# Altium PCB PCB_prob_2024-08-24.pcbdoc
Units mil, origin at the board's own origin, x right, y up, seen from the top; angles counter-clockwise.
Board outline 13105 x 5110 mil, 2 copper layers (Top Layer, Bottom Layer); 57 components, 34 nets, 213 pads, 17 vias.
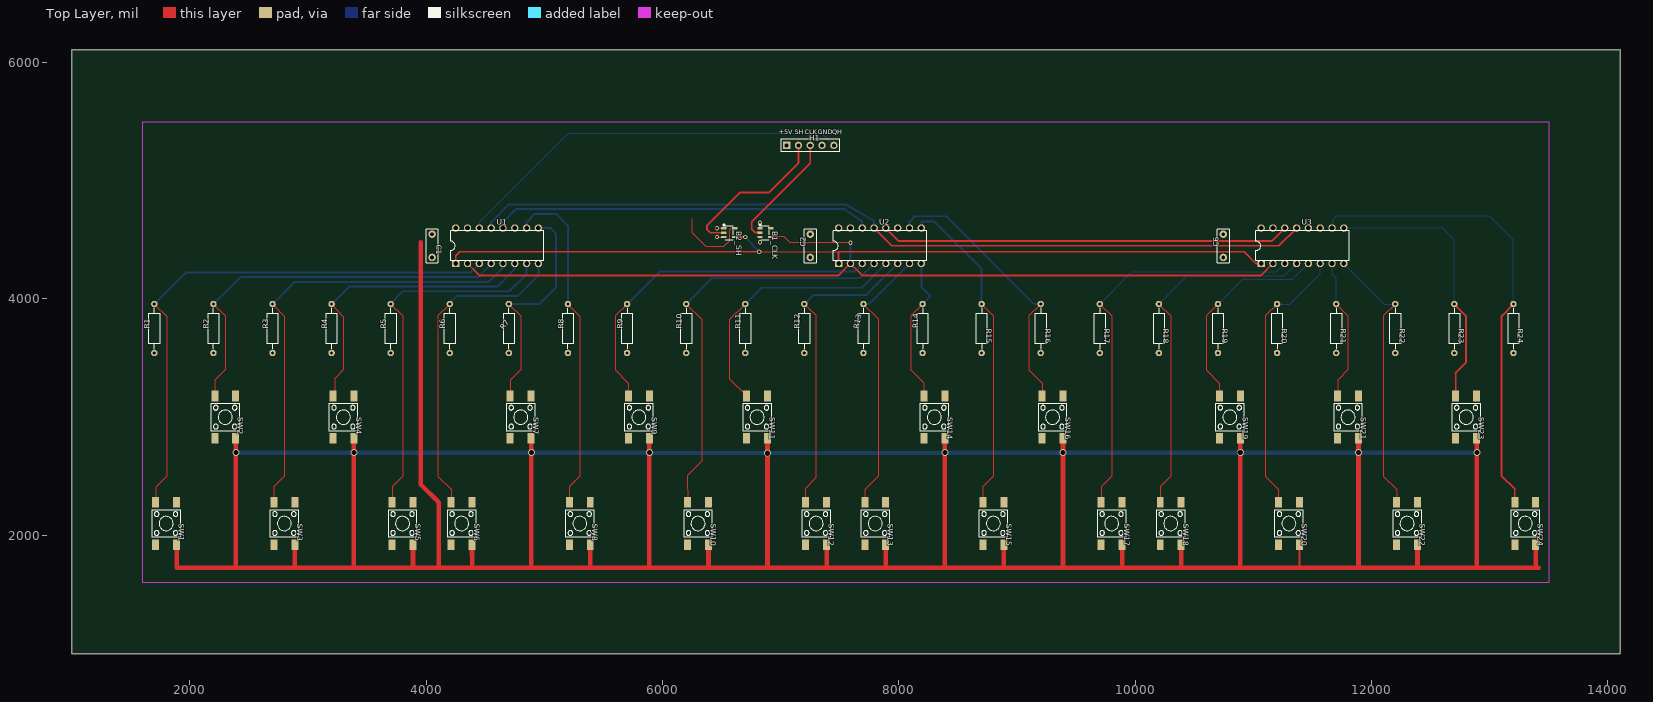
[diagram p0: Top Layer view]
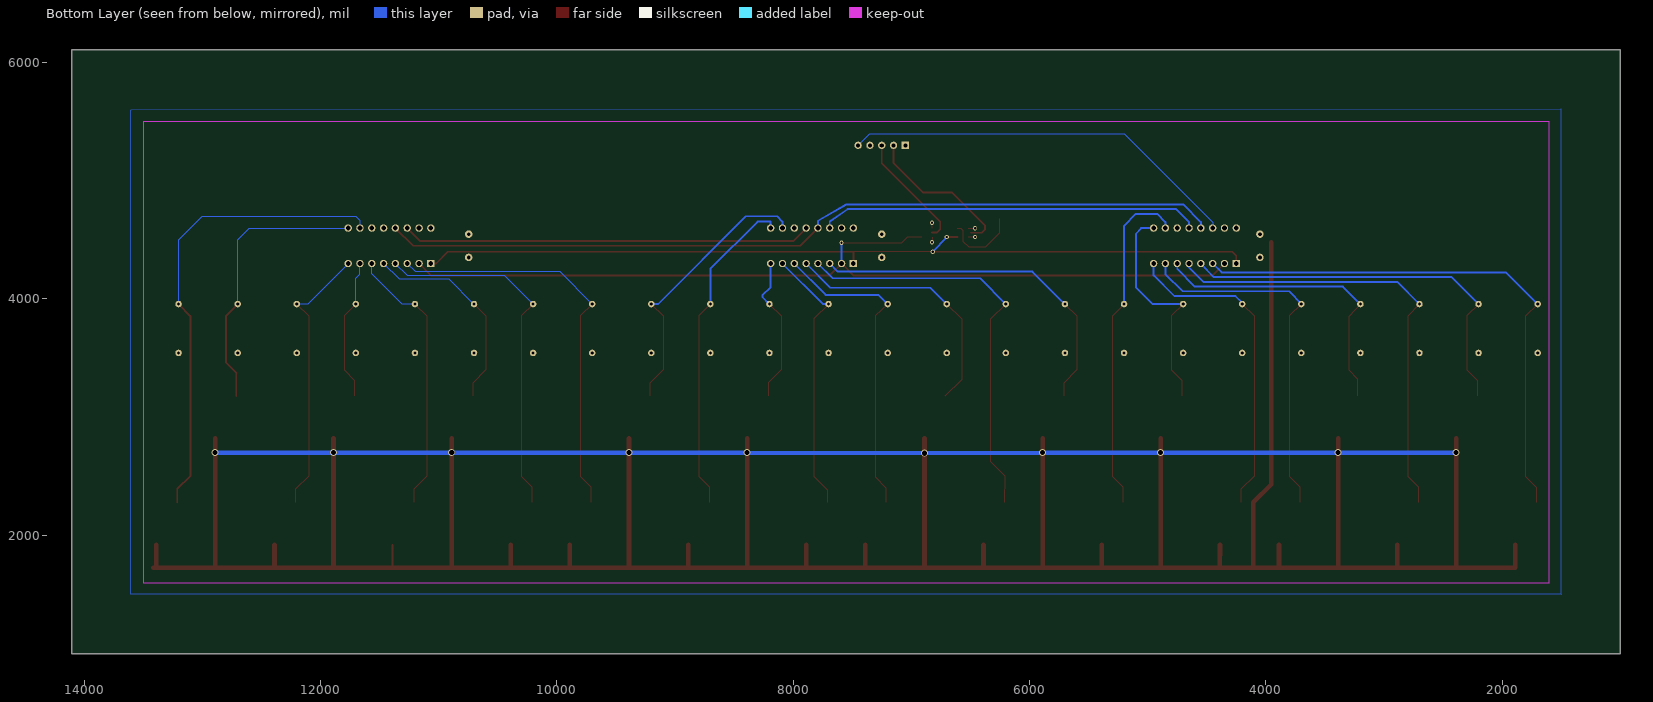
[diagram p1: Bottom Layer view, seen from below]

## Layer stack, top to bottom
Top Layer: signal copper (thickness not stored)
Dielectric: dielectric 12.6, FR-4, Dk 4.8
Bottom Layer: signal copper (thickness not stored)

## Board outline
14105,1000 1000,1000 1000,6110 14105,6110

## Components (designator, comment, footprint, x,y, rotation, side; value= is the part's Value field where it differs from the comment)
B1_CLK "SN74LVC1G125DBVR" SOT-23-5_L3.0-W1.7-P0.95-LS2.8-BL 6870,4561.02 r270 top
B2_SH "SN74LVC1G125DBVR" SOT-23-5_L3.0-W1.7-P0.95-LS2.8-BL 6565,4561.02 r270 top
C1 "100nF" CAP-TH_L7.2-W2.5-P5.00-D0.5 4050,4450 r270 top
C2 "100nF" CAP-TH_L7.2-W2.5-P5.00-D0.5 7250,4450 r90 top
C6 "100nF" CAP-TH_L7.2-W2.5-P5.00-D0.5 10745,4450 r90 top
H1 "HDR-F-2.54_1x5" HDR-F-2.54_1X5 7250,5300 r0 top
R1 "110kΩ" RES-TH_BD2.3-L6.5-P10.50-D0.5 1700,3750 r90 top
R2 "110kΩ" RES-TH_BD2.3-L6.5-P10.50-D0.5 2200,3750 r90 top
R3 "110kΩ" RES-TH_BD2.3-L6.5-P10.50-D0.5 2700,3750 r90 top
R4 "110kΩ" RES-TH_BD2.3-L6.5-P10.50-D0.5 3200,3750 r90 top
R5 "110kΩ" RES-TH_BD2.3-L6.5-P10.50-D0.5 3700,3750 r90 top
R6 "110kΩ" RES-TH_BD2.3-L6.5-P10.50-D0.5 4200,3750 r90 top
R7 "110kΩ" RES-TH_BD2.3-L6.5-P10.50-D0.5 4700,3750 r90 top
R8 "110kΩ" RES-TH_BD2.3-L6.5-P10.50-D0.5 5199.99,3750 r90 top
R9 "110kΩ" RES-TH_BD2.3-L6.5-P10.50-D0.5 5700,3750 r270 top
R10 "110kΩ" RES-TH_BD2.3-L6.5-P10.50-D0.5 6200,3750 r270 top
R11 "110kΩ" RES-TH_BD2.3-L6.5-P10.50-D0.5 6700,3750 r270 top
R12 "110kΩ" RES-TH_BD2.3-L6.5-P10.50-D0.5 7200,3750 r270 top
R13 "110kΩ" RES-TH_BD2.3-L6.5-P10.50-D0.5 7700,3750 r270 top
R14 "110kΩ" RES-TH_BD2.3-L6.5-P10.50-D0.5 8200,3750 r270 top
R15 "110kΩ" RES-TH_BD2.3-L6.5-P10.50-D0.5 8700,3750 r270 top
R16 "110kΩ" RES-TH_BD2.3-L6.5-P10.50-D0.5 9200,3750 r270 top
R17 "110kΩ" RES-TH_BD2.3-L6.5-P10.50-D0.5 9700,3750 r270 top
R18 "110kΩ" RES-TH_BD2.3-L6.5-P10.50-D0.5 10200,3750 r270 top
R19 "110kΩ" RES-TH_BD2.3-L6.5-P10.50-D0.5 10700,3750 r270 top
R20 "110kΩ" RES-TH_BD2.3-L6.5-P10.50-D0.5 11200,3750 r270 top
R21 "110kΩ" RES-TH_BD2.3-L6.5-P10.50-D0.5 11699.98,3750 r270 top
R22 "110kΩ" RES-TH_BD2.3-L6.5-P10.50-D0.5 12199.98,3750 r270 top
R23 "110kΩ" RES-TH_BD2.3-L6.5-P10.50-D0.5 12699.98,3750 r270 top
R24 "110kΩ" RES-TH_BD2.3-L6.5-P10.50-D0.5 13199.98,3750 r270 top
SW1 "SW" SW-SMD_4P-L6.0-W6.0-P4.50-LS9.0-2 1800,2100 r270 top
SW2 "SW" SW-SMD_4P-L6.0-W6.0-P4.50-LS9.0-2 2300,3000 r270 top
SW3 "SW" SW-SMD_4P-L6.0-W6.0-P4.50-LS9.0-2 2800,2100 r270 top
SW4 "SW" SW-SMD_4P-L6.0-W6.0-P4.50-LS9.0-2 3300,3000 r270 top
SW5 "SW" SW-SMD_4P-L6.0-W6.0-P4.50-LS9.0-2 3800,2100 r270 top
SW6 "SW" SW-SMD_4P-L6.0-W6.0-P4.50-LS9.0-2 4300,2100 r270 top
SW7 "SW" SW-SMD_4P-L6.0-W6.0-P4.50-LS9.0-2 4800,3000 r270 top
SW8 "SW" SW-SMD_4P-L6.0-W6.0-P4.50-LS9.0-2 5300,2100 r270 top
SW9 "SW" SW-SMD_4P-L6.0-W6.0-P4.50-LS9.0-2 5800,3000 r270 top
SW10 "SW" SW-SMD_4P-L6.0-W6.0-P4.50-LS9.0-2 6300,2100 r270 top
SW11 "SW" SW-SMD_4P-L6.0-W6.0-P4.50-LS9.0-2 6800,3000 r270 top
SW12 "SW" SW-SMD_4P-L6.0-W6.0-P4.50-LS9.0-2 7300,2100 r270 top
SW13 "SW" SW-SMD_4P-L6.0-W6.0-P4.50-LS9.0-2 7800,2100 r270 top
SW14 "SW" SW-SMD_4P-L6.0-W6.0-P4.50-LS9.0-2 8300,3000 r270 top
SW15 "SW" SW-SMD_4P-L6.0-W6.0-P4.50-LS9.0-2 8800,2100 r270 top
SW16 "SW" SW-SMD_4P-L6.0-W6.0-P4.50-LS9.0-2 9300,3000 r270 top
SW17 "SW" SW-SMD_4P-L6.0-W6.0-P4.50-LS9.0-2 9800,2100 r270 top
SW18 "SW" SW-SMD_4P-L6.0-W6.0-P4.50-LS9.0-2 10300,2100 r270 top
SW19 "SW" SW-SMD_4P-L6.0-W6.0-P4.50-LS9.0-2 10800,3000 r270 top
SW20 "SW" SW-SMD_4P-L6.0-W6.0-P4.50-LS9.0-2 11300,2100 r270 top
SW21 "SW" SW-SMD_4P-L6.0-W6.0-P4.50-LS9.0-2 11799.98,3000 r270 top
SW22 "SW" SW-SMD_4P-L6.0-W6.0-P4.50-LS9.0-2 12299.98,2100 r270 top
SW23 "SW" SW-SMD_4P-L6.0-W6.0-P4.50-LS9.0-2 12799.98,3000 r270 top
SW24 "SW" SW-SMD_4P-L6.0-W6.0-P4.50-LS9.0-2 13299.98,2100 r270 top
U1 "SN74HC165N" DIP-16_L19.8-W6.5-P2.54-LS7.6-BL 4600,4450 r0 top
U2 "SN74HC165N" DIP-16_L19.8-W6.5-P2.54-LS7.6-BL 7840,4450 r0 top
U3 "SN74HC165N" DIP-16_L19.8-W6.5-P2.54-LS7.6-BL 11415,4450 r0 top

## Footprints (in the part's own frame and the unit in brackets; to place one, negate y for a bottom-side part, rotate by r counter-clockwise, add the part's x,y. Pads: shape width x height; smd on the part's side, far side on the other; paste and mask are expansions set on the pad)
CAP-TH_L7.2-W2.5-P5.00-D0.5 [mm]
  round 1.6 hole 0.8 paste+0 mask+0.05: 1(-2.5,0) 2(2.5,0)
  silkscreen extent -3.6,-1.25 3.6,1.25
DIP-16_L19.8-W6.5-P2.54-LS7.6-BL [mm]
  rect 1.6x1.6 hole 1 paste+0 mask+0.051: 1(-8.89,-3.81)
  round 1.6 hole 1 paste+0 mask+0.051: 2(-6.35,-3.81) 3(-3.81,-3.81) 4(-1.27,-3.81) 5(1.27,-3.81) 6(3.81,-3.81) 7(6.35,-3.81) 8(8.89,-3.81) 9(8.89,3.81) 10(6.35,3.81) 11(3.81,3.81) 12(1.27,3.81) 13(-1.27,3.81) 14(-3.81,3.81) 15(-6.35,3.81) 16(-8.89,3.81)
  silkscreen extent -10,-3.2 10,3.2
HDR-F-2.54_1X5 [mil]
  rect 62x62 hole 35 paste+0 mask+2: 1(-200,0)
  round 62 hole 35 paste+0 mask+2: 2(-100,0) 3(0,0) 4(100,0) 5(200,0)
  silkscreen extent -250,-50 250,50
RES-TH_BD2.3-L6.5-P10.50-D0.5 [mm]
  round 1.4 hole 0.7 paste+0 mask+0.051: 1(-5.25,0) 2(5.25,0)
  silkscreen extent -4.32,-1.15 4.32,1.15
SOT-23-5_L3.0-W1.7-P0.95-LS2.8-BL [mm]
  rect 0.49x1.157 smd paste+0 mask+0.051: 1(-0.95,-1.154) 2(0,-1.154) 3(0.95,-1.154)
  rect 0.49x1.175 smd paste+0 mask+0.051: 4(0.95,1.154) 5(-0.95,1.154)
  silkscreen extent -1.8,-1.29 1.53,0.85
SW-SMD_4P-L6.0-W6.0-P4.50-LS9.0-2 [mm]
  rect 2.3x1.5 smd paste+0 mask+0.051: 1(-4.55,2.25) 2(4.55,2.25) 3(-4.55,-2.25) 4(4.55,-2.25)
  silkscreen extent -3,-3 3,3

## Via types
v1: diameter 59.06, hole 43.31, Top Layer to Bottom Layer, tented both sides, 10 vias
v2: diameter 35.43, hole 19.69, Top Layer to Bottom Layer, tented both sides, 7 vias

## Nets (pads, with @x,y where several pads share a name; then routed paths per layer and width w, separated by ;. In a path a pad name is that pad's centre, name@x,y a point inside that pad or via, vN(x,y) a via of type N, cw(c..) or ccw(c..) an arc to the next point about the centre after c; other vN are vias at no path point)
CLK: B1_CLK.2 H1.3 | length 996.6
  Top Layer w15.75: B1_CLK.2 6784,4561 6755,4590 6755,4655 7250,5150 H1.3
CLK_OUT: B1_CLK.4 U1.2 U2.2 U3.2 | length 7852
  Top Layer w10: B1_CLK.4 6915.4,4525 7028.6,4525 7080,4475 v2(7590,4475)
  Top Layer w15.75: U1.2 4450,4200 7490,4200 U2.2 7690,4200 11065,4200 U3.2
  Bottom Layer w15.75: U2.2 v2(7590,4475)
GND_PORT: B1_CLK.1 B1_CLK.3 B2_SH.1 B2_SH.3 C1.2 C2.1 C6.1 H1.4 R1.1 R2.1 R3.1 R4.1 R5.1 R6.1 R7.1 R8.1 R9.2 R10.2 R11.2 R12.2 R13.2 R14.2 R15.2 R16.2 R17.2 R18.2 R19.2 R20.2 R21.2 R22.2 R23.2 R24.2 U1.11 U1.15 U2.11 U2.15 U3.11 U3.15 | length 209.4
  Top Layer w10: v2(6460,4523.62) B2_SH.3@6519.58,4524 ; v2(6460,4598.42) B2_SH.1 ; B1_CLK.3 v2(6825,4480) ; B1_CLK.1 v2(6825,4645)
QH: H1.5 U1.14 | length 3402.1
  Bottom Layer w10: U1.14 4450,4650 5200,5400 7350,5400 H1.5
QH#: U1.13 U2.13 U3.13 | length 7150
  Top Layer w15.75: U2.13 7940,4450 11215,4450 U3.13
  Bottom Layer w15.75: U1.13 4550,4650 4700,4800 7550,4800 7790,4661.5 U2.13
SH/LD#: B2_SH.2 H1.2 | length 1307
  Top Layer w15.75: 6495,4560 6405,4560 6375,4590 6375,4620 6655,4900 6900,4900 7150,5150 H1.2
SH/LD#_OUT: B2_SH.4 U1.1 U2.1 U3.1 | length 7342.2
  Top Layer w10: v2(6817.95,4400) 7490,4400 7490,4355
  Top Layer w15.75: U1.1 4250,4366.4 4285,4400 v2(6817.95,4400) ; B2_SH.4 v2(6700,4523.62) ; U2.1 7490,4400 10920.6,4400 11020.6,4300 U3.1
  Bottom Layer w15.75: v2@6700,4524 v2(6700,4523.62) v2(6817.95,4400)
U1: R1.2 SW1.3 U1.3 | length 4652
  Top Layer w10: R1.2 1805,3851.69 1805,2500 1711.42,2406.42 SW1.3
  Bottom Layer w15.75: R1.2 1968.3,4225 4375,4225 U1.3
U2: R2.2 SW2.3 U1.4 | length 3349.4
  Top Layer w10: R2.2 2300,3856.69 2300,3400 2211.42,3311.42 SW2.3
  Bottom Layer w15.75: R2.2 2428.3,4185 4440,4185 U1.4
U2_14: U1.12 U2.14 | length 3223.7
  Bottom Layer w15.75: U1.12 4650,4650 4760,4760 7540,4760 7690,4655 U2.14
U3: R3.2 SW3.3 U1.5 | length 3867
  Top Layer w10: R3.2 2800,3851.7 2800,2500 2711.4,2411.4 SW3.3
  Bottom Layer w15.75: R3.2 2888.3,4145 4530,4145 4650,4265 U1.5
U3_14: U2.12 U3.14 | length 3466.1
  Top Layer w15.75: U2.12 8000,4490 11155,4490 U3.14
U4: R4.2 SW4.3 U1.6 | length 2566.1
  Top Layer w10: R4.2 3300,3850 3300,3400 3226.41,3326.41 SW4.3@3226.41,3179.13
  Bottom Layer w15.75: R4.2 3348.3,4105 4600,4105 4750,4255 U1.6
U5: R5.2 SW5.3 U1.7 | length 3105.6
  Top Layer w10: R5.2 3800,3856.69 3800,2500 3711.42,2411.42 SW5.3
  Bottom Layer w15.75: R5.2@3695,3956.7 3803.3,4065 4705,4065 4850,4210 U1.7
U6: R6.2 SW6.3 U1.8 | length 2704.7
  Top Layer w10: R6.2 4100,3856.7 4100,2500 4211.42,2388.58 SW6.3
  Bottom Layer w15.75: R6.2@4205,3971.7 4258.3,4025 4775,4025 4950,4200 U1.8
U7: R7.2 SW7.3 U1.9 | length 1937.3
  Top Layer w10: R7.2 4800,3856.68 4800,3400 4711.42,3311.42 SW7.3
  Bottom Layer w15.75: R7.2 4956.7,3956.7 5100,4100 5100,4550 5055,4600 U1.9
U8: R8.2 SW8.3 U1.10 | length 2888
  Top Layer w10: R8.2 5300,3851.68 5300,2500 5211.42,2411.42 SW8.3
  Bottom Layer w15.75: U1.10 4850,4650 4920,4720 5100,4720 5199.98,4620.02 R8.2
U9: R9.1 SW9.3 U2.3 | length 2997.3
  Top Layer w10: R9.1 5600,3856.69 5600,3400 5711.42,3288.58 SW9.3
  Bottom Layer w15.75: R9.1 5975.3,4231.99 7621.99,4231.99 U2.3
U10: R10.1 SW10.3 U2.4 | length 3513.4
  Top Layer w10: R10.1 6330,3826.7 6330,2625 6210,2505 6210,2500 SW10.3
  Bottom Layer w15.75: R10.1 6418.3,4175 7665,4175 U2.4
U11: R11.1 SW11.3 U2.5 | length 2222.2
  Top Layer w10: R11.1 6570,3826.7 6570,3320.5 SW11.3
  Bottom Layer w15.75: R11.1 6838.31,4095 7685,4095 U2.5
U12: R12.1 SW12.3 U2.6 | length 2690.6
  Top Layer w10: R12.1 7300,3861.69 7300,2490 7210,2400 7210,2280.55 SW12.3
  Bottom Layer w15.75: R12.1 7278.31,4035 7725,4035 U2.6
U13: R13.1 SW13.3 U2.7 | length 2308.6
  Top Layer w10: R13.1 7825,3831.69 7825,2500 7711.42,2386.42 SW13.3
  Bottom Layer w15.75: R13.1 7746.69,3956.69 U2.7
U14: R14.1 SW14.3 U2.8 | length 1262.3
  Top Layer w10: R14.1 8100,3856.7 8100,3400 8210,3290 8210,3285 8211.42,3283.58 SW14.3
  Bottom Layer w15.75: U2.8 8190,4100 8260,4030 8260,4016.69 R14.1
U15: R15.1 SW15.3 U2.9 | length 2784.7
  Top Layer w10: R15.1 8800,3856.69 8800,2500 8711.42,2411.42 SW15.3
  Bottom Layer w15.75: U2.9 8190,4655 8300,4655 8700,4255 R15.1
U16: R16.1 SW16.3 U2.10 | length 2356.7
  Top Layer w10: R16.1 9100,3856.69 9100,3400 9211.42,3288.58 SW16.3
  Bottom Layer w15.75: U2.10 8090,4655 8135,4700 8400,4700 9143.31,3956.69 R16.1
U17: R17.1 SW17.3 U3.3 | length 3462.9
  Top Layer w10: R17.1 9800,3856.69 9800,2500 9711.42,2411.42 SW17.3
  Bottom Layer w10: R17.1 9972.04,4228.73 11193.73,4228.73 U3.3
U18: R18.1 SW18.3 U3.4 | length 3062.9
  Top Layer w10: R18.1 10300,3856.69 10300,2500 10211.42,2411.42 SW18.3
  Bottom Layer w10: R18.1 10439.92,4196.61 11261.61,4196.61 U3.4
U19: R19.1 SW19.3 U3.5 | length 1772.3
  Top Layer w10: R19.1 10600,3856.69 10600,3400 10711.42,3288.58 SW19.3
  Bottom Layer w10: R19.1 10701.69,3956.69 10910,4165 11330,4165 U3.5
U20: R20.1 SW20.3 U3.6 | length 2322.1
  Top Layer w10: R20.1 11100,3856.69 11100,2500 11211.42,2388.58 SW20.3
  Bottom Layer w10: R20.1 11306.69,3956.69 11565,4215 U3.6
U21: R21.1 SW21.3 U3.7 | length 1213.5
  Top Layer w10: R21.1 11800,3856.69 11800,3400 11711.42,3311.42 SW21.3
  Bottom Layer w10: U3.7 11665,4210 11700,4175 R21.1
U22: R22.1 SW22.3 U3.8 | length 2342.3
  Top Layer w10: R22.1 12100,3856.69 12100,2500 12211.42,2388.58 SW22.3
  Bottom Layer w10: U3.8 12108.31,3956.69 R22.1
U23: R23.1 SW23.3 U3.9 | length 2381.6
  Top Layer w15.75: R23.1 12699.98,3955.02 12800,3855 12800,3465 12710,3375 12711.39,3373.61 SW23.3
  Bottom Layer w10: U3.9 12600,4600 12700,4500 R23.1@12700,3951.69
U24: R24.1 SW24.3 U3.10 | length 4007.3
  Top Layer w15.75: R24.1 13199.98,3954.98 13100,3855 13100,2500 13211.39,2393.61 SW24.3
  Bottom Layer w10: U3.10 11665,4665 11700,4700 13000,4700 13200,4500 R24.1
VCC_PORT: B1_CLK.5 B2_SH.5 C1.1 C2.2 C6.2 H1.1 SW1.2 SW2.2 SW3.2 SW4.2 SW5.2 SW6.2 SW7.2 SW8.2 SW9.2 SW10.2 SW11.2 SW12.2 SW13.2 SW14.2 SW15.2 SW16.2 SW17.2 SW18.2 SW19.2 SW20.2 SW21.2 SW22.2 SW23.2 SW24.2 U1.16 U2.16 U3.16 | length 39206.1
  Top Layer w10: SW5.2@3888.58,1908.58 SW5.2 ; 6250,4680 6250,4560 6370,4440 6515,4440 6565,4490 6565,4580.9 6580,4598.38 B2_SH.5
  Top Layer w15.75: 11388.6,1725 SW20.2
  Top Layer w39.37: 1888.58,1725 SW1.2 ; 1890,1725 13415,1725 ; SW2.2 2388.58,2700 v1@2390.99,2697.59 ; 2390,1725 v1(2390,2700) ; 2888.62,1725 SW3.2 ; 3388.62,1725 v1(3388.58,2700) SW4.2 ; 3888.58,1725 SW5.2 ; 3955,4480 3955,2430 4105.63,2279.37 4105.63,1725 ; 4388.62,1725 SW6.2 ; SW7.2 4890,2819.45 v1(4890,2700) 4889.99,1725 ; 5388.61,1725 SW8.2 ; v1(5888.57,2700) SW9.2 ; 5888.61,1725 v1(5888.57,2700) ; 6388.61,1725 SW10.2 ; v1(6888.57,2695) SW11.2 ; 6888.61,1725 v1(6888.57,2695) ; 7388.61,1725 SW12.2 ; 7888.61,1725 SW13.2 ; 8388.57,1725 v1(8388.57,2700) ; v1(8388.57,2700) SW14.2 ; 8888.61,1725 SW15.2 ; 9388.57,1725 v1(9388.58,2701.42) SW16.2 ; 9888.6,1725 SW17.2 ; 10388.6,1725 SW18.2 ; 10888.6,1725 v1(10888.56,2700) SW19.2 ; SW21.2@11888.5,2820.9 v1(11888.56,2700) ; 11888.56,1725 v1(11888.56,2700) ; 12388.56,1725 SW22.2 ; SW23.2 12890,2819.45 v1(12890,2700) 12890.02,1725 ; 13388.52,1725 SW24.2@13388.5,1920.9
  Bottom Layer w39.37: v1@2390.99,2697.59 2393.4,2700 v1(3388.58,2700) v1(4890,2700) v1(5888.57,2700) ; v1@5890,2700 v1(6888.57,2695) v1(8388.57,2700) ; v1@8390,2700 v1(9388.58,2701.42) v1(10888.56,2700) ; v1@10890,2700 v1(11888.56,2700) v1(12890,2700)
pads on no net: SW1.1 SW1.4 SW2.1 SW2.4 SW3.1 SW3.4 SW4.1 SW4.4 SW5.1 SW5.4 SW6.1 SW6.4 SW7.1 SW7.4 SW8.1 SW8.4 SW9.1 SW9.4 SW10.1 SW10.4 SW11.1 SW11.4 SW12.1 SW12.4 SW13.1 SW13.4 SW14.1 SW14.4 SW15.1 SW15.4 SW16.1 SW16.4 SW17.1 SW17.4 SW18.1 SW18.4 SW19.1 SW19.4 SW20.1 SW20.4 SW21.1 SW21.4 SW22.1 SW22.4 SW23.1 SW23.4 SW24.1 SW24.4 U3.12

## Polygon pours and split planes (outlines as drawn)
GND_PORT on Bottom Layer (solid): 1505,5610 1505,1505 1500,1500 13605,1500 13605,5595 13600,5600
VCC_PORT on Top Layer (solid): 11120,4515 11120,5490 3890,5490 3890,4440 11120,4440

## Silkscreen, mask and mechanical layers (free items; w line width, h text height)
Top Overlay:
  text "+5V" at 6985,5395.31 h39.37
  text "SH" at 7120,5395.31 h39.37
  text "CLK" at 7205,5395.31 h39.37
  text "GND" at 7315,5395.31 h39.37
  text "QH" at 7435,5395.31 h39.37